# Altium PCB DCDC_POWER_SUPPLY.PcbDoc (part 1 of 2)
Units mm, origin at the board's own origin, x right, y up, seen from the top; angles counter-clockwise.
Board outline 45 x 24.5 mm, 4 copper layers (Top Layer, GND 1, GND 2, Bottom Layer), stack 0.603 mm thick; 43 components, 28 nets, 132 pads, 68 vias.
Unrouted connection lines stored in the file: 3.
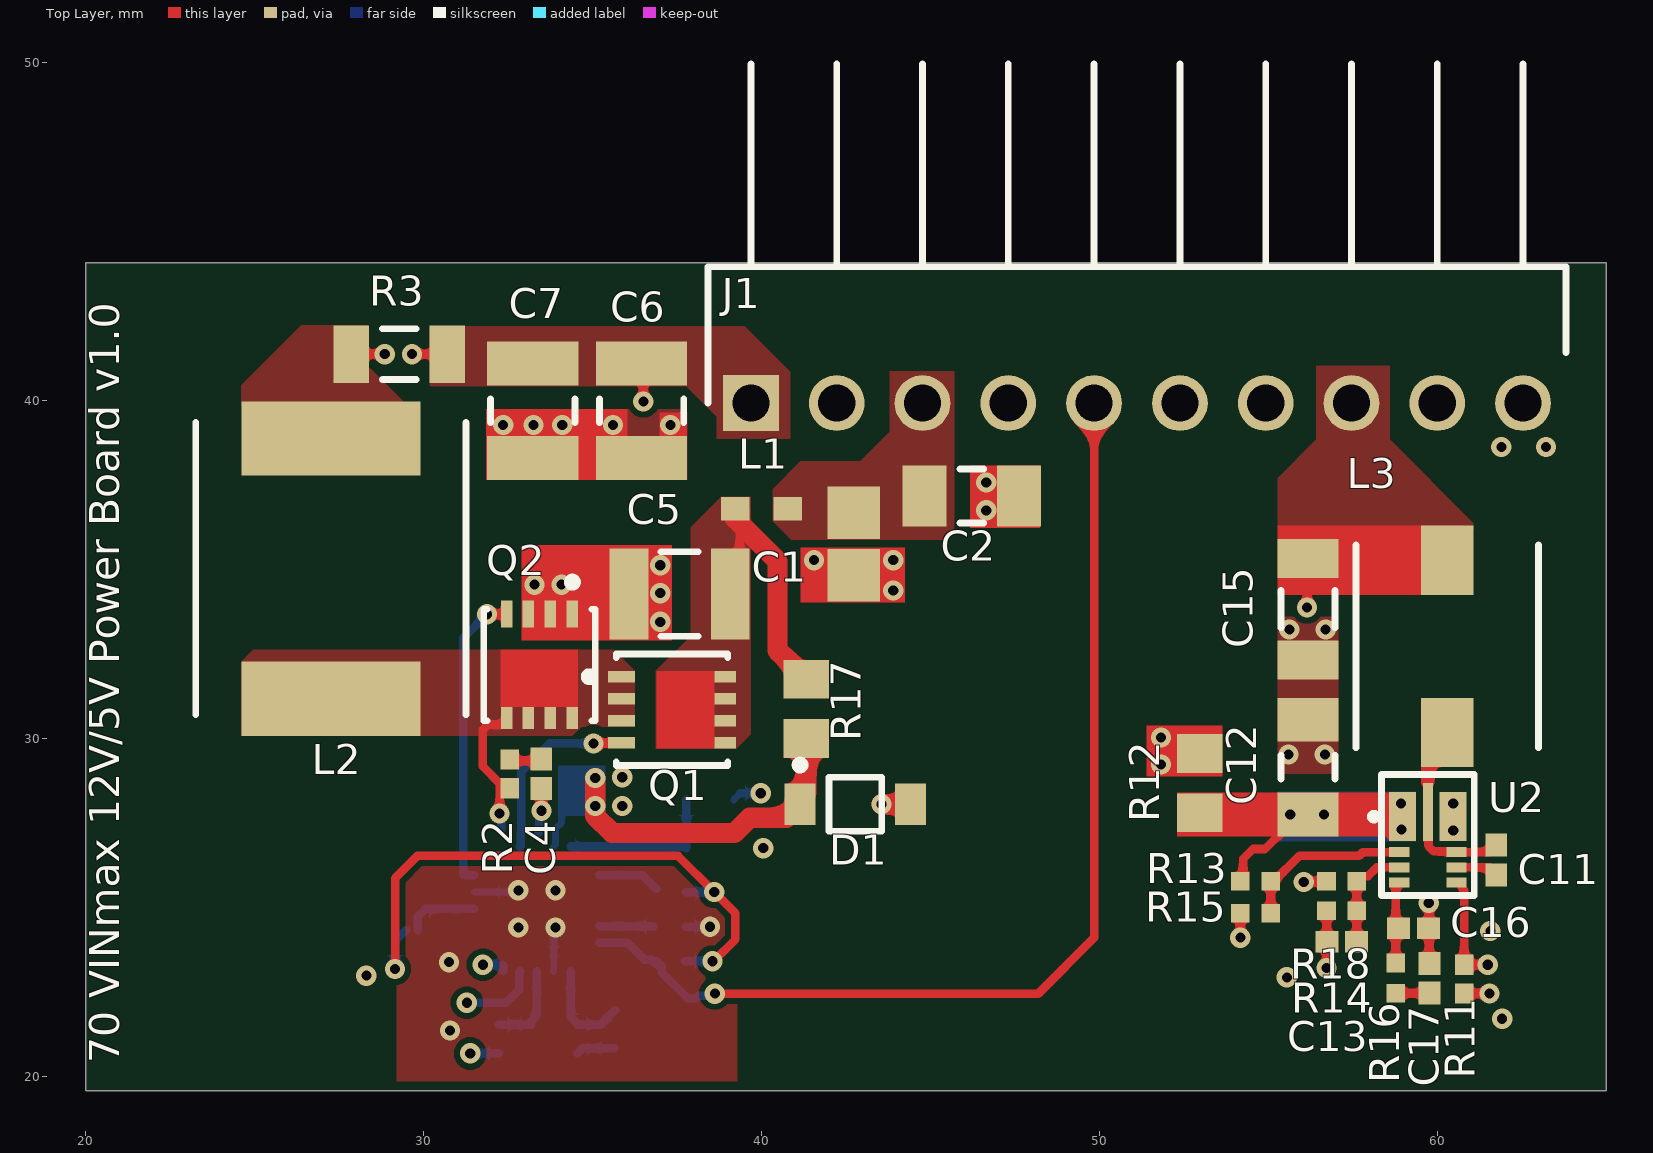
[diagram p0: Top Layer view]
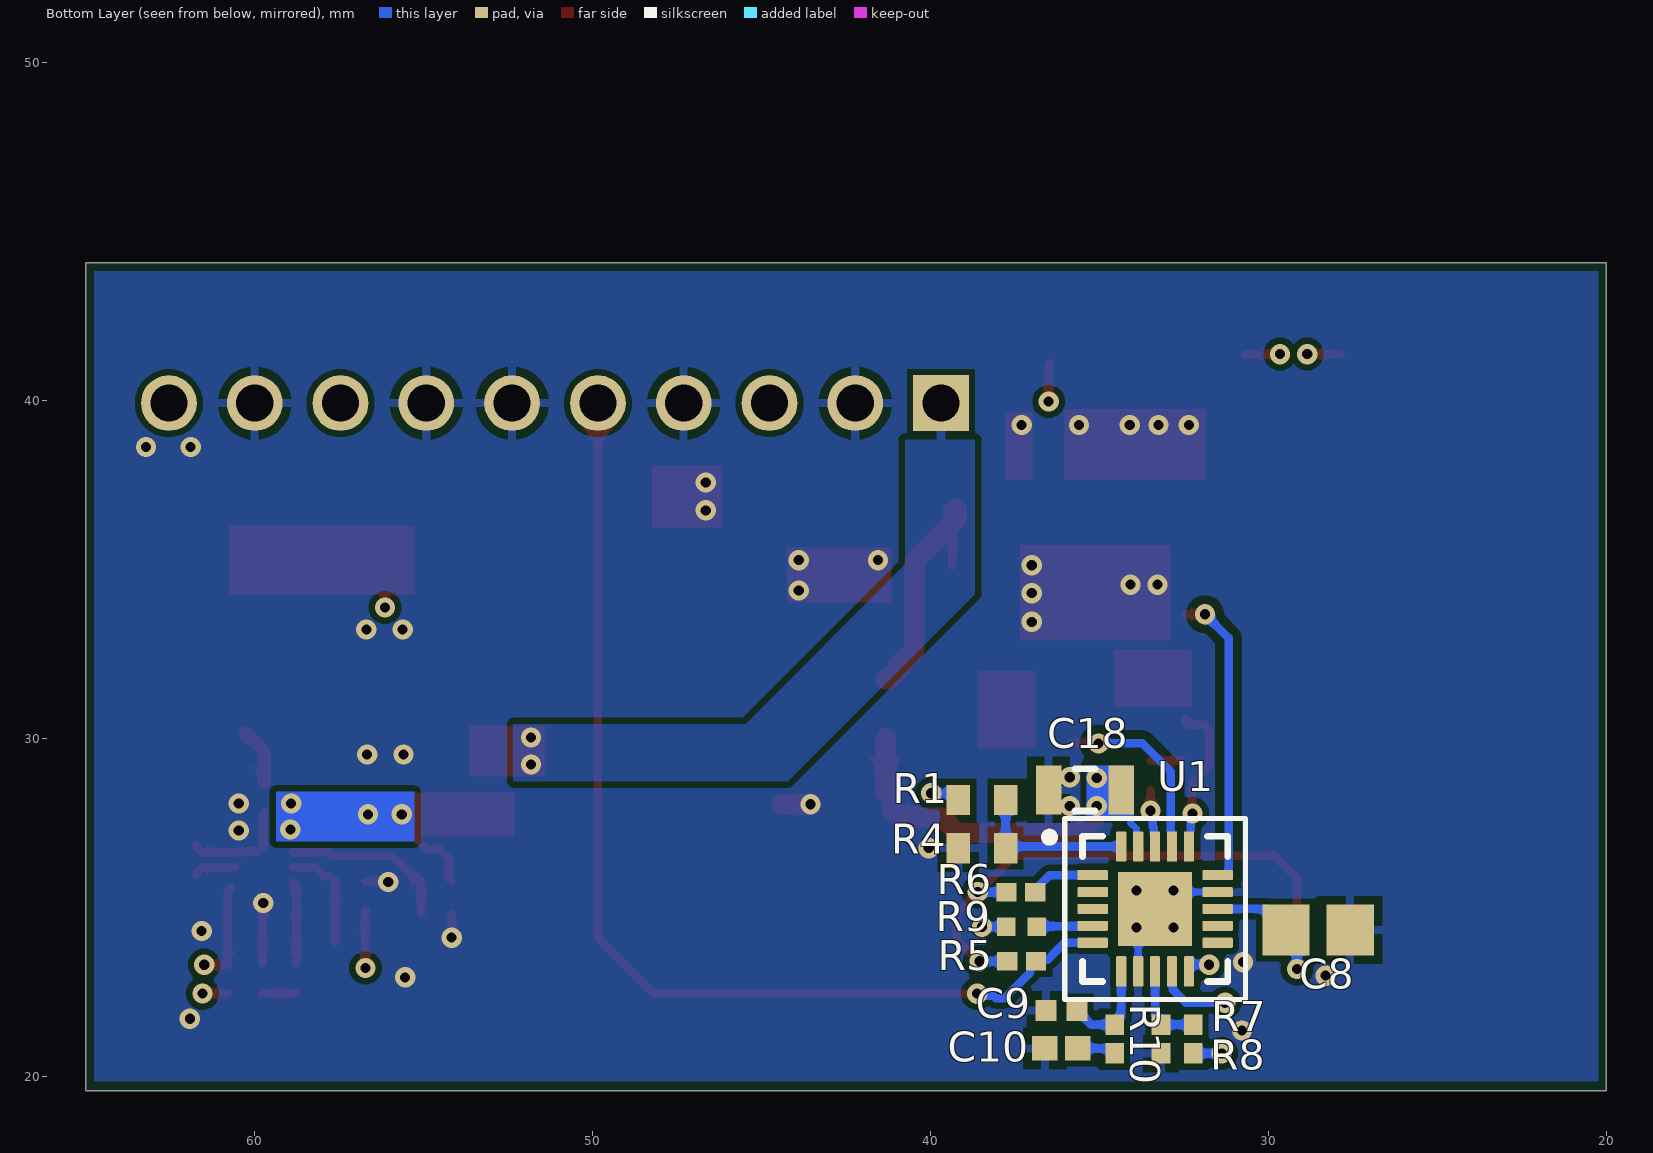
[diagram p1: Bottom Layer view, seen from below]
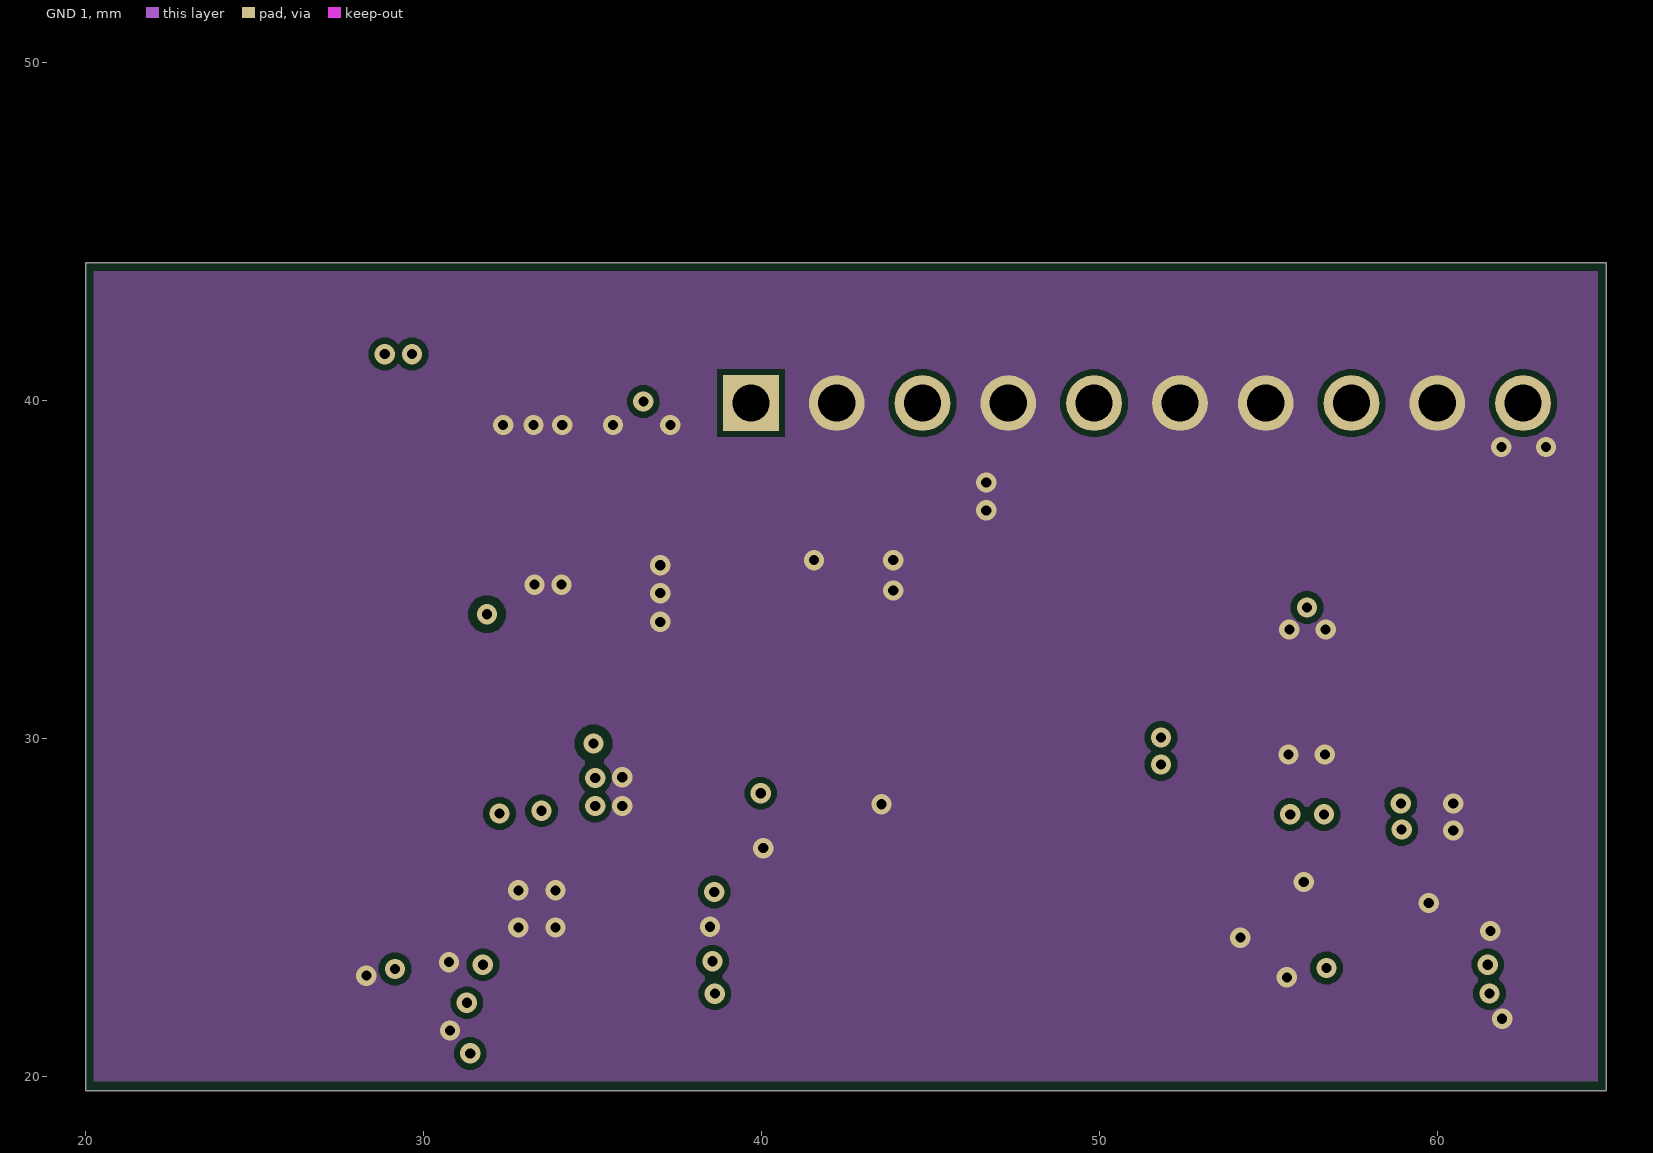
[diagram p2: GND 1]
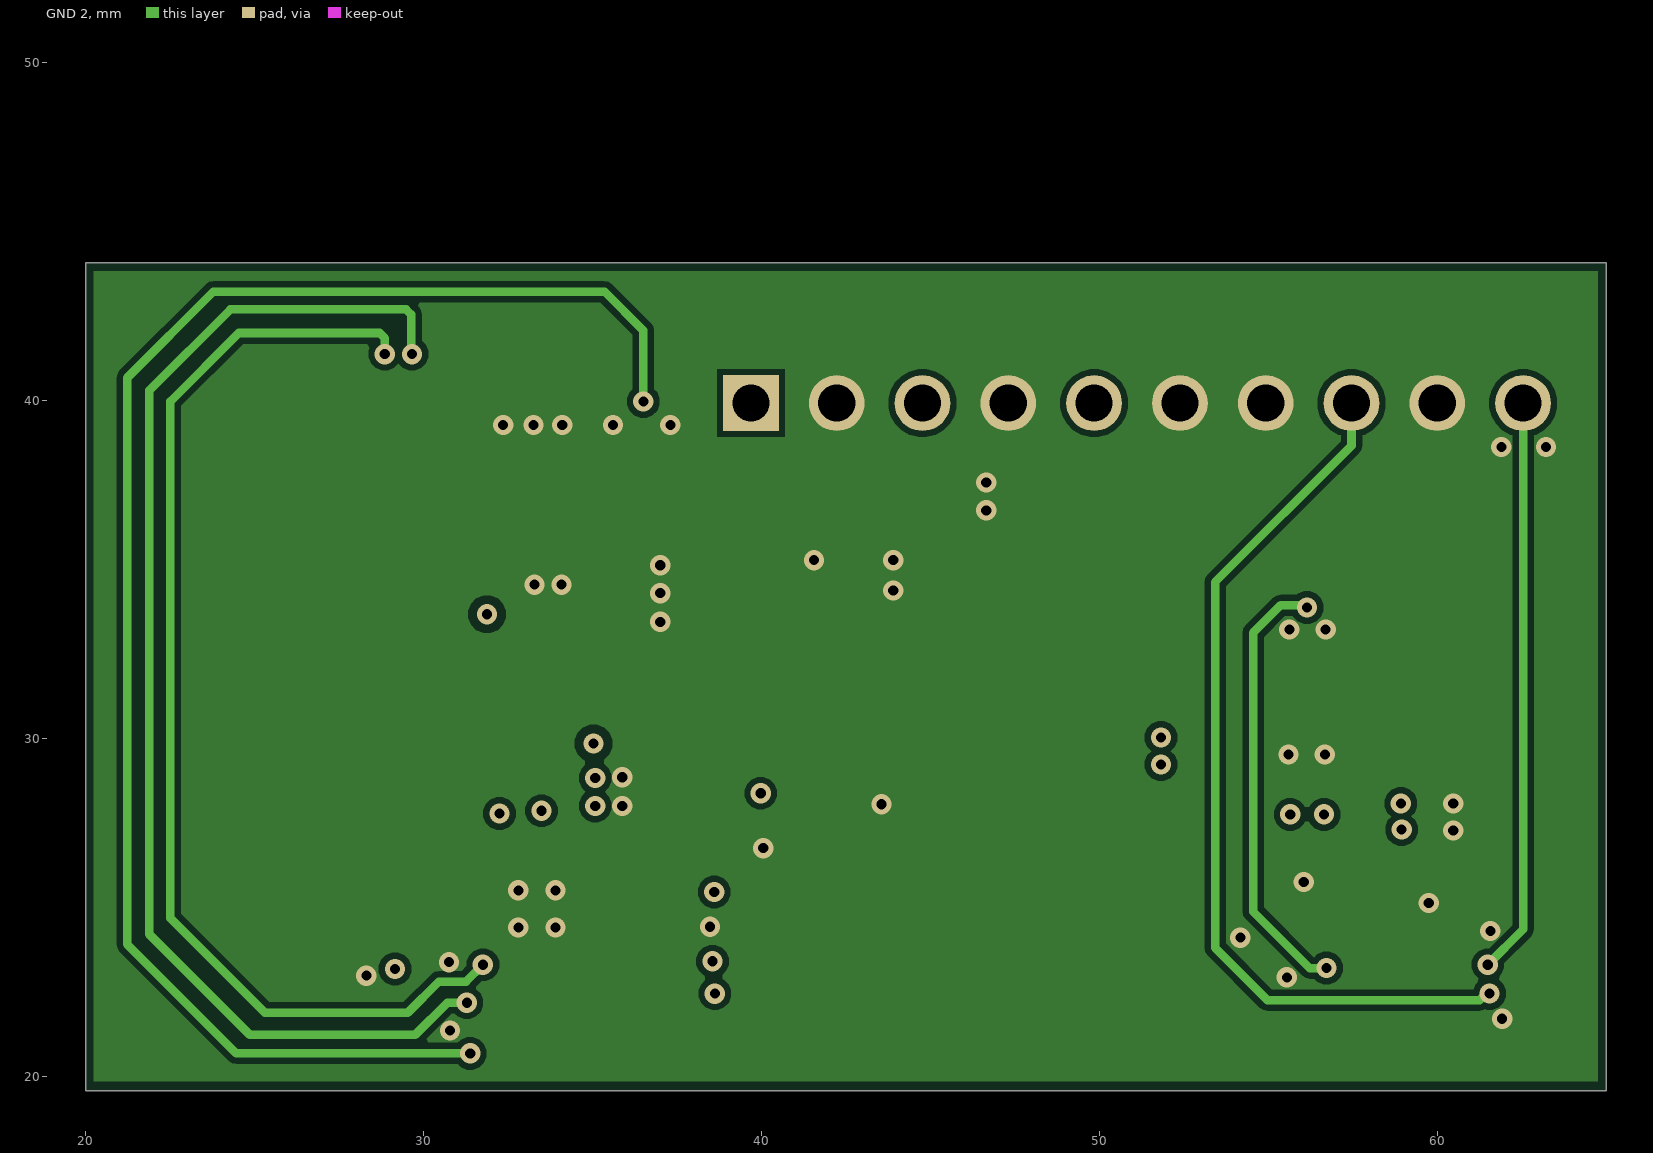
[diagram p3: GND 2]

## Layer stack, top to bottom
Top Solder: solder mask 0.0102, Solder Resist, Dk 3.5
Top Layer: signal copper 0.0356
Dielectric 2: prepreg 0.0711, PP-006, Dk 4.1
GND 1: signal copper 0.035
Dielectric 1: dielectric 0.32, FR-4, Dk 4.8
GND 2: signal copper 0.035
Dielectric 3: prepreg 0.0711, PP-006, Dk 4.1
Bottom Layer: signal copper 0.0356
Bottom Solder: solder mask 0.0102, Solder Resist, Dk 3.5

## Board outline
20,19.575 65,19.575 65,44.075 20,44.075

## Design rules (kind name [scope] priority, off if disabled: settings)
Clearance Clearance_2 [All vs InComponent('U2')] p1: gap=0.15 ignorepadtopadclearanceinfootprint=FALSE
Clearance Clearance_1 [(InNet('NetQ1_4') OR InNet('NetQ2_4'))] p2: gap=0.254 ignorepadtopadclearanceinfootprint=FALSE except(0.178: Arc-SMDPad Arc-THPad Arc-Via Track-SMDPad Track-THPad Track-Via SMDPad-SMDPad SMDPad-THPad SMDPad-Via THPad-THPad THPad-Via Via-Via)
Clearance [All] p3: gap=0.178 ignorepadtopadclearanceinfootprint=FALSE
PolygonConnect PolygonConnect_1 [OnBottomLayer] p1: thpad.connectstyle=Relief thpad.reliefconductorwidth=0.254 thpad.reliefentries=4 thpad.polygonreliefangle="90 Angle" thpad.airgapwidth=0.254 smdpad.connectstyle=Relief smdpad.reliefconductorwidth=0.254 smdpad.reliefentries=4 smdpad.polygonreliefangle="90 Angle" smdpad.airgapwidth=0.254 via.connectstyle=Direct via.reliefconductorwidth=0.254 via.reliefentries=4 via.polygonreliefangle="90 Angle" via.airgapwidth=0.254
PolygonConnect [All] p2: connectstyle=Direct reliefconductorwidth=0.254 reliefentries=4 polygonreliefangle="90 Angle" airgapwidth=0.254
RoutingVias [All] p1: holewidth=0.711 width=1.27 viastyle="Through Hole" minholewidth=0.3 minwidth=0.6 maxholewidth=0.711 maxwidth=1.27
SolderMaskExpansion [All] p1: expansion=0.06 istentingtop=FALSE
Width [All] p1: maxlimit=5 minlimit=0.2 preferedwidth=0.254
30 further rules are at their usual default settings.

## Classes and differential pairs
component class LV_BUCK: C11 C12 C13 C15 C16 C17 L3 R11 R12 R13 R14 R15 R16 R18 U2
component class HV_BUCK: C1 C2 C4 C5 C6 C7 C8 C9 C10 C18 D1 J1 L1 L2 Q1 Q2 R1 R2 R3 R4 R5 R6 R7 R8 R9 R10 R17 U1

## Components (designator, comment, footprint, x,y, rotation, side; value= is the part's Value field where it differs from the comment)
C1 "10nF" CAPC2013X94X50ML20T25 42.725,35.75 r90 top
C2 "1uF" CAPC3216X180X50NL20T25 46.225,37.175 r180 top
C4 "100nF" CAPC1005X56X25NL10T15 33.475,28.95 r90 top
C5 "CAP 2.2uF 100V" CAPC1210(3225)280_N 37.575,34.275 r0 top value=2.2uF
C6 "22uF" CAPC3225X279X50NL20T25 36.45,39.7 r90 top
C7 "22uF" CAPC3225X279X50NL20T25 33.225,39.7 r90 top
C8 "2.2uF" CAPC2013X135X50ML10T20 28.525,24.325 r0 bottom
C9 "1pF" CAPC1005X55X25NL05T05 36.125,21.95 r180 bottom
C10 "1.5nF" CAPC1005X55X25ML05T10 36.125,20.825 r180 bottom
C11 "100nF" CAPC1005X56X25NL10T15 61.75,26.4 r270 top
C12 "4.7uF" CAPC3216X180X50NL20T25 56.175,29.15 r270 top
C13 "10pF" CAPC1005X56X25NL10T15 57.175,23.975 r180 top
C15 "22uF" CAPC1206(3216)190_N 56.175,33.825 r90 top
C16 "15pF" CAPC1005X56X25NL10T15 59.3,24.375 r180 top
C17 "10nF" CAPC1005X56X25NL10T15 59.775,22.9 r270 top
C18 "1uF" CAPC2013X145X20NL20 35.425,28.475 r180 bottom
D1 "62V" ONSC-SOD-123-2-425-04_V 42.775,28.05 r0 top
J1 "61301011021" HDRRA10W64P0X254_1X10_2540X254X254P 39.685,39.925 r0 top
L1 "742792651" SMD-0603 40,36.8 r180 top
L2 "22uH" INDPM8680X400N 27.25,35.025 r90 top
L3 "PA4340.103NLT" INDPM6054X300N 60.3,32.725 r90 top
Q1 "IAUZ20N08S5L300" INF-PG-TSDSON-8-1_V 37.35,30.85 r180 top
Q2 "IAUZ20N08S5L300" INF-PG-TSDSON-8-1_V 33.425,32.175 r90 top
R1 "1M" RESC1608X55X25NL10T15 38.475,28.175 r0 bottom
R2 "3R3" RESC1005X40X25NL05T10 32.55,28.95 r90 top
R3 "27 mOhm" RESC3116X65X40NL10T20 29.275,41.375 r0 top
R4 "100K" RESC1608X55X25NL10T15 38.475,26.75 r180 bottom
R5 "100K" RESC1005X40X25NL05T10 37.3,23.4 r180 bottom
R6 "100K" RESC1005X40X25NL05T10 37.325,25.45 r180 bottom
R7 "162K" RESC1005X40X25NL05T10 32.225,21.1 r270 bottom
R8 "10K" RESC1005X40X25NL05T10 33.175,21.1 r90 bottom
R9 "28.7K" RESC1005X40X25NL05T05 37.3,24.425 r180 bottom
R10 "392K" RESC1005X40X25NL05T10 34.55,21.1 r90 bottom
R11 "100K" RESC1005X40X25NL05T10 60.8,22.875 r270 top
R12 "4.7R" RESC2013X70X40NL20T20 52.975,28.675 r90 top
R13 "470k" RESC1005X40X25NL05T05 54.625,25.775 r180 top
R14 "158K" RESC1005X40X25NL05T05 57.175,24.9 r180 top
R15 "82k" RESC1005X40X25NL05T05 54.625,24.825 r0 top
R16 "42.2K" RESC1005X40X25NL05T05 58.775,22.9 r90 top
R17 "4.7R" RESC2013X70X40NL20T20 41.325,30.875 r90 top
R18 "30K" RESC1005X40X25NL05T05 57.175,25.775 r0 top
U1 "MAX25208" QFN50P400X400X80_HS-21N 33.35,24.95 r180 bottom
U2 "AP63357QZV-7" AP63357QZV7 59.725,26.975 r0 top

## Footprints (in the part's own frame and the unit in brackets; to place one, negate y for a bottom-side part, rotate by r counter-clockwise, add the part's x,y. Pads: shape width x height; smd on the part's side, far side on the other; paste and mask are expansions set on the pad)
AP63357QZV7 [mm]
  rect 0.8x1.45 smd: 1(-0.75,0.707) 8(0.75,0.707)
  rect 0.6x0.3 smd: 2(-0.85,-0.344) 3(-0.85,-0.794) 4(-0.85,-1.244) 5(0.85,-1.244) 6(0.85,-0.794) 7(0.85,-0.344)
  rect 0.3x1.725 smd: 9(0,0.844)
  silkscreen extent -1.7,0.61 -1.5,0.81, body extent -1,-1.5 1,1.5, height 0.95
CAPC1005X55X25ML05T10 [mm] "Chip Capacitor, 2-Leads, Body 1.00x0.50mm, IPC Low Density"
  rect 0.76x0.72 smd: 1(-0.49,0) 2(0.49,0)
  body extent -0.53,-0.28 0.53,0.27, height 0.55
CAPC1005X55X25NL05T05 [mm] "Chip Capacitor, 2-Leads, Body 1.00x0.50mm, IPC Medium Density"
  rect 0.62x0.62 smd: 1(-0.46,0) 2(0.46,0)
  body extent -0.53,-0.28 0.53,0.27, height 0.55
CAPC1005X56X25NL10T15 [mm] "Chip Capacitor, 2-Leads, Body 1.00x0.50mm, IPC Medium Density"
  rect 0.68x0.64 smd: 1(-0.44,0) 2(0.44,0)
  body extent -0.55,-0.3 0.55,0.3, height 0.56
CAPC1206(3216)190_N [mm] "Chip Capacitor, Body 3.2x1.6mm, Height 1.9mm, IPC Medium Density"
  rect 1.15x1.8 smd: 1(-1.5,0) 2(1.5,0)
  silkscreen extent -0.55,-0.8 0.55,0.8, body extent -1.7,-0.9 1.7,0.9, height 1.9
CAPC1210(3225)280_N [mm] "Chip Capacitor, Body 3.2x2.5mm, Height 2.8mm, IPC Medium Density"
  rect 1.15x2.7 smd: 1(-1.5,0) 2(1.5,0)
  silkscreen extent -0.55,-1.25 0.55,1.25, body extent -1.7,-1.4 1.7,1.4, height 2.8
CAPC2013X94X50ML20T25 [mm] "Chip Capacitor, 2-Leads, Body 2.01x1.25mm, IPC Low Density"
  rect 1.55x1.55 smd: 1(-0.925,0) 2(0.925,0)
  body extent -1.1,-0.72 1.11,0.72, height 0.94
CAPC2013X135X50ML10T20 [mm] "Chip Capacitor, 2-Leads, Body 2.00x1.25mm, IPC Low Density"
  rect 1.4x1.5 smd: 1(-0.95,0) 2(0.95,0)
  body extent -1.05,-0.67 1.05,0.67, height 1.35
CAPC2013X145X20NL20 [mm] "Chip Capacitor, 2-Leads, Body 2.20x1.45mm, IPC Medium Density"
  rect 0.75x1.45 smd: 1(-1.075,0) 2(1.075,0)
  silkscreen extent -0.3,-0.63 0.3,0.63, body extent -1.1,-0.72 1.1,0.72, height 1.45
CAPC3216X180X50NL20T25 [mm] "Chip Capacitor, 2-Leads, Body 3.20x1.60mm, IPC Medium Density"
  rect 1.3x1.8 smd: 1(-1.4,0) 2(1.4,0)
  silkscreen extent -0.35,-0.8 0.35,0.8, body extent -1.7,-0.9 1.7,0.9, height 1.8
CAPC3225X279X50NL20T25 [mm] "Chip Capacitor, 2-Leads, Body 3.40x2.70mm, IPC Medium Density"
  rect 1.3x2.7 smd: 1(-1.4,0) 2(1.4,0)
  silkscreen extent -0.35,-1.25 0.35,1.25, body extent -1.7,-1.35 1.7,1.35, height 2.79
HDRRA10W64P0X254_1X10_2540X254X254P [mm]
  rect 1.65x1.65 hole 1.1: 1(0,0)
  round 1.65 hole 1.1: 2(2.54,0) 3(5.08,0) 4(7.62,0) 5(10.16,0) 6(12.7,0) 7(15.24,0) 8(17.78,0) 9(20.32,0) 10(22.86,0)
  silkscreen extent -1.27,0 24.13,10.04, body extent -1.27,-0.32 24.13,10.04, height 2.54
INDPM6054X300N [mm]
  rect 2.05x1.55 smd: 1(-2.55,0) 2(2.55,0)
  silkscreen extent -3,-2.7 3,2.7, body extent -3,-2.7 3,2.7, height 3
INDPM8680X400N [mm]
  rect 2.2x5.3 smd: 1(-3.85,0) 2(3.85,0)
  silkscreen extent -4.33,-4 4.33,4, body extent -4.33,-4 4.33,4, height 4
INF-PG-TSDSON-8-1_V [mm] "TSDSON, 8-Leads, Body 3.3x3.3mm, Pitch 0.65mm"
  rect 0.8x0.34 smd: 1(1.5,-0.975) 2(1.5,-0.325) 3(1.5,0.325) 4(1.5,0.975)
  rect 0.65x0.34 smd: 5(-1.575,0.975) 6(-1.575,0.325) 7(-1.575,-0.325) 8(-1.575,-0.975)
  Top Layer region: -1.25,-1.145 0.46,-1.145 0.46,1.145 -1.25,1.145
  silkscreen extent -1.65,-1.65 2.57,1.65, body extent -1.65,-1.65 1.65,1.65, height 1.1
ONSC-SOD-123-2-425-04_V [mm] "SOD, 2-Leads, Body 2.69x1.6mm"
  rect 0.91x1.22 smd: 1(-1.635,0) 2(1.635,0)
  silkscreen extent -1.76,-0.8 0.78,1.28, body extent -1.35,-0.8 1.35,0.8, height 1.35
QFN50P400X400X80_HS-21N [mm] "QFN, 20-Leads, Body 4.00x4.00mm, Pitch 0.50mm, Thermal Pad 2.20x2.20mm, IPC Medium Density"
  rrect20% 0.9x0.3 smd: 1(-1.85,1) 2(-1.85,0.5) 3(-1.85,0) 4(-1.85,-0.5) 5(-1.85,-1) 11(1.85,-1) 12(1.85,-0.5) 13(1.85,0) 14(1.85,0.5) 15(1.85,1)
  rrect20% 0.3x0.9 smd: 6(-1,-1.85) 7(-0.5,-1.85) 8(0,-1.85) 9(0.5,-1.85) 10(1,-1.85) 16(1,1.85) 17(0.5,1.85) 18(0,1.85) 19(-0.5,1.85) 20(-1,1.85)
  rect 2.2x2.2 smd: 21(0,0)
  silkscreen extent -3.25,-2.68 2.68,2.68, body extent -2,-2 2,2, height 0.8
RESC1005X40X25NL05T05 [mm] "Chip Resistor, 2-Leads, Body 1.00x0.50mm, IPC Medium Density"
  rect 0.55x0.55 smd: 1(-0.45,0) 2(0.45,0)
  body extent -0.53,-0.27 0.53,0.28, height 0.4
RESC1005X40X25NL05T10 [mm] "Chip Resistor, 2-Leads, Body 1.00x0.50mm, IPC Medium Density"
  rect 0.6x0.55 smd: 1(-0.425,0) 2(0.425,0)
  body extent -0.53,-0.27 0.53,0.28, height 0.4
RESC1608X55X25NL10T15 [mm] "Chip Resistor, 2-Leads, Body 1.60x0.80mm, IPC Medium Density"
  rect 0.7x0.9 smd: 1(-0.7,0) 2(0.7,0)
  body extent -0.85,-0.45 0.85,0.45, height 0.55
RESC2013X70X40NL20T20 [mm] "Chip Resistor, 2-Leads, Body 2.2x1.35mm, IPC Medium Density"
  rect 1.15x1.35 smd: 1(-0.875,0) 2(0.875,0)
  body extent -1.1,-0.67 1.1,0.67, height 0.7
RESC3116X65X40NL10T20 [mm] "Chip Resistor, 2-Leads, Body 3.10x1.60mm, IPC Medium Density"
  rect 1.05x1.7 smd: 1(-1.425,0) 2(1.425,0)
  silkscreen extent -0.5,-0.75 0.5,0.75, body extent -1.6,-0.85 1.6,0.85, height 0.65
SMD-0603 [mm] "Chip Inductor, 2-Leads, Body 1.6x0.8mm"
  rect 0.85x0.7 smd: 1(-0.775,0) 2(0.775,0)
  body extent -0.8,-0.4 0.8,0.4, height 0.79

## Part data
C1: library part CMP-2007-04169-1, "Cap Ceramic 0.01uF 100V X7R 10% SMD 0805 FlexiTerm 125C Paper T/R", Case Code (Imperial)=0805, Case Code (Metric)=2012, Dielectric=X7R, Manufacturer="AVX Interconnect / Elco", Manufacturer Part Number=08051C103KAZ2A, Max Operating Temperature=125°C, Min Operating Temperature=-55°C, Package Quantity=1, Supplier Part Number 1=478-3559-1-ND, Temperature coefficient=30ppm/°C, Tolerance=10%, Voltage=100V, Capacitance=10nF, Case/Package=0805, Category="Ceramic Capacitors", ComponentLink1Description=https://datasheet.ciiva.com/26904/getdatasheetpartid-136837-26904192.pdf?src-supplier=Verical, ComponentLink1URL=https://datasheet.ciiva.com/26904/getdatasheetpartid-136837-26904192.pdf?src-supplier=Verical, ComponentLink2Description=https://datasheet.ciiva.com/11787/0900766b80dc2409-11787665.pdf?src-supplier=RSComponents, ComponentLink2URL=https://datasheet.ciiva.com/11787/0900766b80dc2409-11787665.pdf?src-supplier=RSComponents, ComponentLink3Description=https://datasheet.ciiva.com/151/flexiterm-151492.pdf?src-supplier=Digi-Key, ComponentLink3URL=https://datasheet.ciiva.com/151/flexiterm-151492.pdf?src-supplier=Digi-Key, ComponentLink4Description=https://datasheet.ciiva.com/151/flexiterm-151493.pdf?src-supplier=Digi-Key, ComponentLink4URL=https://datasheet.ciiva.com/151/flexiterm-151493.pdf?src-supplier=Digi-Key, ComponentLink5Description=https://datasheet.ciiva.com/16326/cx7r-16326741.pdf?src-supplier=Future+Electronics, ComponentLink5URL=https://datasheet.ciiva.com/16326/cx7r-16326741.pdf?src-supplier=Future+Electronics, ComponentLink6Description=https://datasheet.ciiva.com/151/flexiterm-151494.pdf?src-supplier=Digi-Key, ComponentLink6URL=https://datasheet.ciiva.com/151/flexiterm-151494.pdf?src-supplier=Digi-Key, ComponentLink7Description=https://datasheet.ciiva.com/16625/flexiterm-16625227.pdf?src-supplier=Avnet+Europe, ComponentLink7URL=https://datasheet.ciiva.com/16625/flexiterm-16625227.pdf?src-supplier=Avnet+Europe, ComponentLink8Description=https://datasheet.ciiva.com/11508/flexiterm-11508220.pdf?src-supplier=Avnet, ComponentLink8URL=https://datasheet.ciiva.com/11508/flexiterm-11508220.pdf?src-supplier=Avnet, ComponentLink9Description=https://datasheet.ciiva.com/5416/cx7r-218113-5416686.pdf?src-supplier=Mouser, ComponentLink9URL=https://datasheet.ciiva.com/5416/cx7r-218113-5416686.pdf?src-supplier=Mouser, Construction=Flat, Depth=1.25mm, Dissipation Factor=2.5%, Features="Soft Termination", Height=0.94mm, Lead Free="Lead Free", Length=2.01mm, Mount="Surface Mount", Number of Pins=2, Packaging="Tape and Reel", Part Number=08051C103KAZ2A, Pricing 1="1=0.27000, 10=0.18200, 50=0.10880, 100=0.09200, 500=0.06292, 1000=0.05566 (USD)", Radiation Hardening=No, REACH SVHC="No SVHC", RoHS=Yes, RoHS Compliant=Yes, Series=FLEXITERM®, Stock 1=40, Supplier 1=Digi-Key, Termination=SMD/SMT, Thickness=0.037inch, Voltage Rating=100V, Voltage Rating (DC)=100V, Width=0.049inch
C2: library part CMP-1037-04728-2, "Chip Capacitor, 1 uF, +/- 10%, 100 V, -55 to 125 degC, 1206 (3216 Metric), RoHS, Tape and Reel", Capacitance=1µF, Case Size/Dimension=1206, Dielectric=X7R, Manufacturer=AVX, Package Description="2-Pin Surface Mount Device, Body 3.2 x 1.6 mm", Rated Voltage=100V, Tolerance (%)=±10%, Datasheet URL=http://datasheets.avx.com/X7RDielectric.pdf, Datasheet Version=07/2016, Manufacturer URL=http://www.avx.com/, Mounting Technology=SurfaceMount, Package Reference=1206
C4 C11: library part CMP-2008-02800-1, "AVX 0.1uF Multilayer Ceramic Capacitor (MLCC) 16 V dc 10% X7R dielectric 402 SMT max op. temp. +125C", Case Code (Imperial)=0402, Case Code (Metric)=1005, Dielectric=X7R, Dielectric Material=Ceramic, Manufacturer="AVX Interconnect / Elco", Manufacturer Part Number=0402YC104KAT2A, Max Operating Temperature=125°C, Min Operating Temperature=-55°C, Package Quantity=1, Supplier Part Number 1=478-7888-1-ND, Tolerance=10%, Voltage=16V, Capacitance=100nF, Case/Package=0402, Category="Ceramic Capacitors", ComponentLink1Description=https://datasheet.ciiva.com/1123/1679506-1123956.pdf?src-supplier=Element14, ComponentLink1URL=https://datasheet.ciiva.com/1123/1679506-1123956.pdf?src-supplier=Element14, ComponentLink2Description=https://datasheet.ciiva.com/7614/cx7r-7614662.pdf?src-supplier=Digi-Key, ComponentLink2URL=https://datasheet.ciiva.com/7614/cx7r-7614662.pdf?src-supplier=Digi-Key, ComponentLink3Description=https://datasheet.ciiva.com/22693/1679506-22693578.pdf?src-supplier=Element14, ComponentLink3URL=https://datasheet.ciiva.com/22693/1679506-22693578.pdf?src-supplier=Element14, ComponentLink4Description=https://datasheet.ciiva.com/16623/cx7r-16623291.pdf?src-supplier=Avnet+Europe, ComponentLink4URL=https://datasheet.ciiva.com/16623/cx7r-16623291.pdf?src-supplier=Avnet+Europe, ComponentLink5Description=https://datasheet.ciiva.com/2987/cx7r-2987708.pdf?src-supplier=Avnet, ComponentLink5URL=https://datasheet.ciiva.com/2987/cx7r-2987708.pdf?src-supplier=Avnet, ComponentLink6Description=https://datasheet.ciiva.com/6265/cx7r-6265276.pdf?src-supplier=Digi-Key, ComponentLink6URL=https://datasheet.ciiva.com/6265/cx7r-6265276.pdf?src-supplier=Digi-Key, ComponentLink7Description=https://datasheet.ciiva.com/28613/1679506-28613260.pdf?src-supplier=Element14, ComponentLink7URL=https://datasheet.ciiva.com/28613/1679506-28613260.pdf?src-supplier=Element14, ComponentLink8Description=https://datasheet.ciiva.com/5411/cx7r-218113-5411197.pdf?src-supplier=Mouser, ComponentLink8URL=https://datasheet.ciiva.com/5411/cx7r-218113-5411197.pdf?src-supplier=Mouser, ComponentLink9Description=https://datasheet.ciiva.com/7709/1679506-7709566.pdf?src-supplier=Element14, ComponentLink9URL=https://datasheet.ciiva.com/7709/1679506-7709566.pdf?src-supplier=Element14, Construction=Flat, Contact Plating=Tin,Matte, Depth=0.5mm, Height=0.56mm, Lead Free="Lead Free", Length=1mm, Mount="Surface Mount,PCB", Packaging="Tape and Reel", Part Number=0402YC104KAT2A, Pricing 1="1=0.10000, 10=0.01600, 50=0.00860, 100=0.00700, 500=0.00500, 1000=0.00393, 2500=0.00358, 5000=0.00329 (USD)", Radiation Hardening=No, REACH SVHC=Unknown, RoHS=Yes, RoHS Compliant=Yes, Series=-, Stock 1=72315, Supplier 1=Digi-Key, Termination=SMD/SMT, Thickness=0.022inch, Voltage Rating=16V, Voltage Rating (DC)=16V, Width=0.02inch
C5: library part CMP-1038-02104-1, "CAP 2.2uF 100V ±10% 1210 (3225 Metric) Thickness 2.8mm SMD", Case-EIA=1210, Case-Metric=3225, Rated Voltage="100 V", Tolerance=Â±10%, Max Thickness="2.8 mm", Technology=SMT
C6 C7: library part CMP-2000-05478-1, "Ceramic Capacitor, 25 V, 22 uF, +/-10%, -55 to 85 degC, 2-Pin SMD (1210), RoHS, Tape and Reel", Case Code - in=1210, Case Code - mm=3225, Case Height=2.79mm, Case Length=3.2mm, Case Width=2.5mm, Dielectric=X5R, Manufacturer=AVX, Maximum Operating Temperature=+85C, Minimum Operating Temperature=-55C, Operating Temperature Range=-55Cto+85C, Package / Case=1210(3225metric), Package Description="2-Pin Surface Mount Device, Body 3.2 x 2.5 mm", Temperature Coefficient / Code=+/-15%, Tolerance=10%, Voltage Rating=25V, Brand=AVX, Capacitance=22uF, Datasheet URL=http://datasheets.avx.com/cx5r.pdf, Datasheet Version=05/2016, Dimensions=2.5mmWx3.2mmLx2.79mmH, Factory Pack Quantity=1000, Manufacturer URL=http://www.avx.com/, Mounting Technology=SurfaceMount, Package Reference=1210, Packaging=Reel, Product=GeneralTypeMLCCs, Product Category=MultilayerCeramicCapacitorsMLCC-SMD/SMT, RoHS=Details, Termination Style=SMD/SMT, Type=StandardX5RMLCCs, Voltage Rating DC=25V
C8: library part CMP-2007-03455-1, Case Code (Imperial)=0805, Case Code (Metric)=2012, Dielectric=X7R, Manufacturer=Murata, Manufacturer Part Number=GRM21BR71C225KA12L, Max Operating Temperature=125°C, Min Operating Temperature=-55°C, Package Quantity=1, Supplier Part Number 1=490-3906-1-ND, Tolerance=10%, Voltage=16V, Capacitance=2.2uF, Case/Package=0805, Category="Ceramic Capacitors", ComponentLink1Description=https://datasheet.ciiva.com/3777/97grm21br71c225ka1223-3777119.pdf?src-supplier=Arrow+Electronics, ComponentLink1URL=https://datasheet.ciiva.com/3777/97grm21br71c225ka1223-3777119.pdf?src-supplier=Arrow+Electronics, ComponentLink2Description=https://datasheet.ciiva.com/7937/608985-7937701.pdf?src-supplier=Element14, ComponentLink2URL=https://datasheet.ciiva.com/7937/608985-7937701.pdf?src-supplier=Element14, ComponentLink3Description=https://datasheet.ciiva.com/5416/product-5416103.pdf?src-supplier=Mouser, ComponentLink3URL=https://datasheet.ciiva.com/5416/product-5416103.pdf?src-supplier=Mouser, ComponentLink4Description=https://datasheet.ciiva.com/11615/product-11615451.pdf?src-supplier=Avnet, ComponentLink4URL=https://datasheet.ciiva.com/11615/product-11615451.pdf?src-supplier=Avnet, ComponentLink5Description=https://datasheet.ciiva.com/16440/product-16440619.pdf?src-supplier=Future+Electronics, ComponentLink5URL=https://datasheet.ciiva.com/16440/product-16440619.pdf?src-supplier=Future+Electronics, ComponentLink6Description=https://datasheet.ciiva.com/137/partnumbering-e-01-137677.pdf?src-supplier=Digi-Key, ComponentLink6URL=https://datasheet.ciiva.com/137/partnumbering-e-01-137677.pdf?src-supplier=Digi-Key, ComponentLink7Description=https://datasheet.ciiva.com/137/partnumbering-e-01-137678.pdf?src-supplier=Digi-Key, ComponentLink7URL=https://datasheet.ciiva.com/137/partnumbering-e-01-137678.pdf?src-supplier=Digi-Key, ComponentLink8Description=https://datasheet.ciiva.com/137/partnumbering-e-01-137679.pdf?src-supplier=Digi-Key, ComponentLink8URL=https://datasheet.ciiva.com/137/partnumbering-e-01-137679.pdf?src-supplier=Digi-Key, Construction=Flat, Depth=1.25mm, Height=1.25mm, Lead Free="Lead Free", Length=2mm, Mount="Surface Mount", Number of Pins=2, Packaging="Tape and Reel", Part Number=GRM21BR71C225KA12L, Pricing 1="1=0.33000, 10=0.23000, 50=0.15300, 100=0.13010, 500=0.09184, 1000=0.08036 (USD)", Radiation Hardening=No, REACH SVHC="No SVHC", RoHS=Yes, RoHS Compliant=Yes, Series=GRM, Stock 1=321, Supplier 1=Digi-Key, Termination=SMD/SMT, Thickness=0.053inch, Voltage Rating=16V, Voltage Rating (DC)=16V, Width=1.25mm
C9: library part CMP-2100-03588-1, "Chip Capacitor, 1 pF, +/- 0.25 pF, 50 V, -55 to 125 degC, 0402 (1005 Metric), RoHS, Tape and Reel", Case Code (Imperial)=0402, Case Code (Metric)=1005, Dielectric=C0G, Dielectric Material=Ceramic, Insulation Resistance=100GR, Manufacturer=Yageo, Manufacturer Part Number=CC0402CRNPO9BN1R0, Max Operating Temperature=125degC, Min Operating Temperature=-55degC, Package Description="2-Pin Surface Mount Device, Body 1 x 0.5 mm", Package Quantity=10000, Supplier Part Number 1=311-2076-1-ND, Tolerance=5%, Voltage Rating=50V, Capacitance=1pF, Case/Package=0402, Category="Ceramic Capacitors", ComponentLink1Description=https://datasheet.ciiva.com/17437/upy-gp-np0-16v-to-50v-8-17437445.pdf?src-supplier=Avnet+Europe, ComponentLink1URL=https://datasheet.ciiva.com/17437/upy-gp-np0-16v-to-50v-8-17437445.pdf?src-supplier=Avnet+Europe, ComponentLink2Description=https://datasheet.ciiva.com/8033/1443161-8033590.pdf?src-supplier=Element14, ComponentLink2URL=https://datasheet.ciiva.com/8033/1443161-8033590.pdf?src-supplier=Element14, ComponentLink3Description=https://datasheet.ciiva.com/11587/upy-gp-np0-16v-to-50v-8-11587159.pdf?src-supplier=Avnet, ComponentLink3URL=https://datasheet.ciiva.com/11587/upy-gp-np0-16v-to-50v-8-11587159.pdf?src-supplier=Avnet, ComponentLink4Description=https://datasheet.ciiva.com/17437/upy-gp-np0-16v-to-50v-8-17437447.pdf?src-supplier=Avnet+Europe, ComponentLink4URL=https://datasheet.ciiva.com/17437/upy-gp-np0-16v-to-50v-8-17437447.pdf?src-supplier=Avnet+Europe, ComponentLink5Description=https://datasheet.ciiva.com/176/mlccorderingcode-176344.pdf?src-supplier=Digi-Key, ComponentLink5URL=https://datasheet.ciiva.com/176/mlccorderingcode-176344.pdf?src-supplier=Digi-Key, ComponentLink6Description=https://datasheet.ciiva.com/7656/1132289-7656600.pdf?src-supplier=Element14, ComponentLink6URL=https://datasheet.ciiva.com/7656/1132289-7656600.pdf?src-supplier=Element14, ComponentLink7Description=https://datasheet.ciiva.com/11587/upy-gp-np0-16v-to-50v-8-11587161.pdf?src-supplier=Avnet, ComponentLink7URL=https://datasheet.ciiva.com/11587/upy-gp-np0-16v-to-50v-8-11587161.pdf?src-supplier=Avnet, ComponentLink8Description=https://datasheet.ciiva.com/13389/upy-gp-np0-16v-to-50v-8-13389355.pdf?src-supplier=Mouser, ComponentLink8URL=https://datasheet.ciiva.com/13389/upy-gp-np0-16v-to-50v-8-13389355.pdf?src-supplier=Mouser, Composition=Ceramic, Construction=Flat, Datasheet URL=http://www.yageo.com/documents/recent/UPY-GP_NP0_16V-to-50V_14.pdf, Datasheet Version="Rev. 14, 07/2016", Depth=0.5mm, Height=0.5mm, Lead Free=LeadFree, Length=1mm, Manufacturer URL=http://www.yageo.com/, Mount=SurfaceMount, Package Reference=0402, Packaging=TapeandReel, Pricing 1="1=0.10000, 10=0.02700, 50=0.01500, 100=0.01220, 500=0.00870, 1000=0.00683, 2500=0.00621, 5000=0.00571 (USD)", Radiation Hardening=No, REACH SVHC=NoSVHC, Resistor Type=Ceramic, RoHS=Yes, RoHS Compliant=Yes, RoHSCompliant=True, Series=CC, Stock 1=254020, Supplier 1=Digi-Key, Termination=SMD/SMT, Thickness=0.022inch, Voltage Rating (DC)=50V, Width=0.02inch
C10: library part CMP-2008-04642-1, Case Code (Imperial)=0402, Case Code (Metric)=1005, Dielectric=X7R, Manufacturer=Murata, Manufacturer Part Number=GRM155R71H152KA01D, Max Operating Temperature=125°C, Min Operating Temperature=-55°C, Package Quantity=10000, Supplier Part Number 1=490-3245-1-ND, Tolerance=10%, Voltage=50V, Capacitance=1.5nF, Case/Package=0402, Category="Ceramic Capacitors", ComponentLink1Description=https://datasheet.ciiva.com/18184/getdatasheetpartid-153042-18184727.pdf?src-supplier=Verical, ComponentLink1URL=https://datasheet.ciiva.com/18184/getdatasheetpartid-153042-18184727.pdf?src-supplier=Verical, ComponentLink2Description=https://datasheet.ciiva.com/19476/1856441-19476519.pdf?src-supplier=Jameco, ComponentLink2URL=https://datasheet.ciiva.com/19476/1856441-19476519.pdf?src-supplier=Jameco, ComponentLink3Description=https://datasheet.ciiva.com/129/grm155r71h152ka01-01-129756.pdf?src-supplier=Digi-Key, ComponentLink3URL=https://datasheet.ciiva.com/129/grm155r71h152ka01-01-129756.pdf?src-supplier=Digi-Key, ComponentLink4Description=https://datasheet.ciiva.com/129/grm155r71h152ka01-01-129757.pdf?src-supplier=Digi-Key, ComponentLink4URL=https://datasheet.ciiva.com/129/grm155r71h152ka01-01-129757.pdf?src-supplier=Digi-Key, ComponentLink5Description=https://datasheet.ciiva.com/129/grm155r71h152ka01-01-129758.pdf?src-supplier=Digi-Key, ComponentLink5URL=https://datasheet.ciiva.com/129/grm155r71h152ka01-01-129758.pdf?src-supplier=Digi-Key, ComponentLink6Description=https://datasheet.ciiva.com/29199/454238-da-01-en-vs-kondensator-0402-29199743.pdf?src-supplier=Conrad, ComponentLink6URL=https://datasheet.ciiva.com/29199/454238-da-01-en-vs-kondensator-0402-29199743.pdf?src-supplier=Conrad, ComponentLink7Description=https://datasheet.ciiva.com/22698/608985-22698421.pdf?src-supplier=Element14, ComponentLink7URL=https://datasheet.ciiva.com/22698/608985-22698421.pdf?src-supplier=Element14, ComponentLink8Description=https://datasheet.ciiva.com/7937/608985-7937626.pdf?src-supplier=Element14, ComponentLink8URL=https://datasheet.ciiva.com/7937/608985-7937626.pdf?src-supplier=Element14, ComponentLink9Description=https://datasheet.ciiva.com/2989/product-2989403.pdf?src-supplier=Avnet, ComponentLink9URL=https://datasheet.ciiva.com/2989/product-2989403.pdf?src-supplier=Avnet, ComponentLink10Description=https://datasheet.ciiva.com/14116/grmseries-highdielectrictype-eng-14116907.pdf?src-supplier=Distrelec, ComponentLink10URL=https://datasheet.ciiva.com/14116/grmseries-highdielectrictype-eng-14116907.pdf?src-supplier=Distrelec, ComponentLink11Description=https://datasheet.ciiva.com/16199/product-16199179.pdf?src-supplier=Future+Electronics, ComponentLink11URL=https://datasheet.ciiva.com/16199/product-16199179.pdf?src-supplier=Future+Electronics, ComponentLink12Description=https://datasheet.ciiva.com/14116/grmseries-highdielectrictype-eng-14116846.pdf?src-supplier=Distrelec, ComponentLink12URL=https://datasheet.ciiva.com/14116/grmseries-highdielectrictype-eng-14116846.pdf?src-supplier=Distrelec, Depth=0.5mm, Height=0.5mm, Lead Free="Lead Free", Length=1mm, Material=Ceramic, Mount="Surface Mount", Number of Pins=2, Packaging="Tape and Reel", Part Number=GRM155R71H152KA01D, Pricing 1="1=0.10000, 10=0.02200, 50=0.01180, 100=0.00960, 500=0.00686, 1000=0.00538, 2500=0.00490, 5000=0.00450 (USD)", Radiation Hardening=No, REACH SVHC="No SVHC", RoHS=Yes, RoHS Compliant=Yes, Stock 1=353359, Supplier 1=Digi-Key, Termination=SMD/SMT, Thickness=0.022inch, Voltage Rating=50V, Voltage Rating (DC)=50V, Width=0.5mm
C12: library part CMP-2000-07581-1, "Chip Capacitor, 4.7 uF, +/- 10%, 50 V, -55 to 125 degC, 1206 (3216 Metric), RoHS, Tape and Reel", Case Code (Imperial)=1206, Case Code (Metric)=3216, Dielectric=X7R, Manufacturer=AVX, Manufacturer Part Number=12065C475KAT2A, Max Operating Temperature=125degC, Min Operating Temperature=-55degC, Package Description="2-Pin Surface Mount Device, Body 3.2 x 1.6 mm", Package Quantity=1, Supplier Part Number 1=478-6653-1-ND, Tolerance=10%, Voltage Rating=50V, Capacitance=4.7uF, Case/Package=1206, Case\/Package=1206, Category="Ceramic Capacitors", ComponentLink1Description=https://datasheet.ciiva.com/5410/cx7r-218113-5410549.pdf?src-supplier=Mouser, ComponentLink1URL=https://datasheet.ciiva.com/5410/cx7r-218113-5410549.pdf?src-supplier=Mouser, ComponentLink2Description=https://datasheet.ciiva.com/16387/flexiterm-16387141.pdf?src-supplier=Future+Electronics, ComponentLink2URL=https://datasheet.ciiva.com/16387/flexiterm-16387141.pdf?src-supplier=Future+Electronics, ComponentLink3Description=https://datasheet.ciiva.com/153/cx7r-153750.pdf?src-supplier=Digi-Key, ComponentLink3URL=https://datasheet.ciiva.com/153/cx7r-153750.pdf?src-supplier=Digi-Key, ComponentLink4Description=https://datasheet.ciiva.com/7833/cx7r-7833462.pdf?src-supplier=Element14, ComponentLink4URL=https://datasheet.ciiva.com/7833/cx7r-7833462.pdf?src-supplier=Element14, ComponentLink5Description=https://datasheet.ciiva.com/153/cx7r-153751.pdf?src-supplier=Digi-Key, ComponentLink5URL=https://datasheet.ciiva.com/153/cx7r-153751.pdf?src-supplier=Digi-Key, ComponentLink6Description=https://datasheet.ciiva.com/7833/cx7r-7833463.pdf?src-supplier=Element14, ComponentLink6URL=https://datasheet.ciiva.com/7833/cx7r-7833463.pdf?src-supplier=Element14, ComponentLink7Description=https://datasheet.ciiva.com/153/cx7r-153752.pdf?src-supplier=Digi-Key, ComponentLink7URL=https://datasheet.ciiva.com/153/cx7r-153752.pdf?src-supplier=Digi-Key, Contact Plating=Matte, Datasheet URL=http://datasheets.avx.com/X7RDielectric.pdf, Datasheet Version=03/2017, Depth=1.6mm, Dissipation Factor=2.5%, Lead Free=LeadFree, Length=3.2mm, Manufacturer URL=http://www.avx.com/, Mount=SurfaceMount, Mounting Technology=SurfaceMount, Package Reference=1206, Packaging=TapeandReel, Pricing 1="1=0.51000, 10=0.35400, 100=0.21250, 500=0.15940, 1000=0.13460 (USD)", Radiation Hardening=No, REACH SVHC=NoSVHC, RoHS=Yes, RoHSCompliant=True, Stock 1=241833, Supplier 1=Digi-Key, Termination=SMD/SMT, Thickness=0.07inch, Voltage Rating (DC)=50V, Width=1.6mm
C13: library part CMP-2008-02563-1, "CERAMIC CAPACITOR, 10PF, 50V, C0G, 5%, SMD, FULL REEL; Product Range:-; Capacitance:10pF; Capacitance Tolerance: 5%; Dielectric Characteristic:C0G / NP0; Voltage Rating:50V; Ceramic Capacitor Case:0402 [1005 Metric]; No. of Pins:2 ;RoHS Compliant: Yes", Case Code (Imperial)=0402, Case Code (Metric)=1005, Dielectric=C0G, Dielectric Material=Ceramic, Manufacturer="AVX Interconnect / Elco", Manufacturer Part Number=04025A100DAT2A, Max Operating Temperature=125°C, Min Operating Temperature=-55°C, Package Quantity=1, Supplier Part Number 1=478-7870-1-ND, Temperature coefficient=30ppm/°C, Tolerance=5%, Voltage=50V, Capacitance=10pF, Case/Package=0402, Category="Ceramic Capacitors", ComponentLink1Description=https://datasheet.ciiva.com/11788/0900766b80def0e2-11788539.pdf?src-supplier=RSComponents, ComponentLink1URL=https://datasheet.ciiva.com/11788/0900766b80def0e2-11788539.pdf?src-supplier=RSComponents, ComponentLink2Description=https://datasheet.ciiva.com/2990/ccog-2990165.pdf?src-supplier=Avnet, ComponentLink2URL=https://datasheet.ciiva.com/2990/ccog-2990165.pdf?src-supplier=Avnet, ComponentLink3Description=https://datasheet.ciiva.com/16623/ccog-16623350.pdf?src-supplier=Avnet+Europe, ComponentLink3URL=https://datasheet.ciiva.com/16623/ccog-16623350.pdf?src-supplier=Avnet+Europe, ComponentLink4Description=https://datasheet.ciiva.com/14906/ccog-14906265.pdf?src-supplier=Digi-Key, ComponentLink4URL=https://datasheet.ciiva.com/14906/ccog-14906265.pdf?src-supplier=Digi-Key, ComponentLink5Description=https://datasheet.ciiva.com/206/ccog-206459.pdf?src-supplier=Digi-Key, ComponentLink5URL=https://datasheet.ciiva.com/206/ccog-206459.pdf?src-supplier=Digi-Key, ComponentLink6Description=https://datasheet.ciiva.com/14906/ccog-14906267.pdf?src-supplier=Digi-Key, ComponentLink6URL=https://datasheet.ciiva.com/14906/ccog-14906267.pdf?src-supplier=Digi-Key, ComponentLink7Description=https://datasheet.ciiva.com/1123/ccog-1123468.pdf?src-supplier=Element14, ComponentLink7URL=https://datasheet.ciiva.com/1123/ccog-1123468.pdf?src-supplier=Element14, ComponentLink8Description=https://datasheet.ciiva.com/1123/ccog-1123469.pdf?src-supplier=Element14, ComponentLink8URL=https://datasheet.ciiva.com/1123/ccog-1123469.pdf?src-supplier=Element14, Construction=Flat, Contact Plating=Tin,Matte, Depth=0.5mm, Height=0.56mm, Lead Free="Lead Free", Length=1mm, Mount="Surface Mount", Number of Pins=2, Packaging="Tape and Reel", Part Number=04025A100DAT2A, Pricing 1="1=0.30000, 10=0.20700, 50=0.13800, 100=0.11730, 500=0.08280, 1000=0.07245, 2500=0.06900, 5000=0.06382 (USD)", Radiation Hardening=No, REACH SVHC="No SVHC", RoHS=Yes, RoHS Compliant=Yes, Series=-, Stock 1=172687, Supplier 1=Digi-Key, Termination=SMD/SMT, Thickness=0.022inch, Voltage Rating=50V, Voltage Rating (DC)=50V, Width=0.02inch
C15: library part CMP-1037-04985-1, "CAP 22uF 6.3V ±10% 1206 (3216 Metric) Thickness 1.9mm SMD", Case Code (Imperial)=1206, Case Code (Metric)=3216, Dielectric=X7R, Manufacturer="Kyocera AVX", Manufacturer Part Number=12066C226KAT2A, Max Operating Temperature=125°C, Min Operating Temperature=-55°C, Package Quantity=2500, Rated Voltage="6.3 V", Supplier Part Number 1=478-5997-1-ND, Tolerance=Â±10%, Voltage=6.3V, Capacitance=22uF, Case-EIA=1206, Case-Metric=3216, Case/Package=1206, Category="Ceramic Capacitors", ComponentLink1Description=https://datasheet.ciiva.com/11786/0900766b80dc2409-11786266.pdf?src-supplier=RSComponents, ComponentLink1URL=https://datasheet.ciiva.com/11786/0900766b80dc2409-11786266.pdf?src-supplier=RSComponents, ComponentLink2Description=https://datasheet.ciiva.com/16315/cx7r-16315655.pdf?src-supplier=Future+Electronics, ComponentLink2URL=https://datasheet.ciiva.com/16315/cx7r-16315655.pdf?src-supplier=Future+Electronics, ComponentLink3Description=https://datasheet.ciiva.com/154/cx7r-154924.pdf?src-supplier=Digi-Key, ComponentLink3URL=https://datasheet.ciiva.com/154/cx7r-154924.pdf?src-supplier=Digi-Key, ComponentLink4Description=https://datasheet.ciiva.com/154/cx7r-154925.pdf?src-supplier=Digi-Key, ComponentLink4URL=https://datasheet.ciiva.com/154/cx7r-154925.pdf?src-supplier=Digi-Key, ComponentLink5Description=https://datasheet.ciiva.com/154/cx7r-154926.pdf?src-supplier=Digi-Key, ComponentLink5URL=https://datasheet.ciiva.com/154/cx7r-154926.pdf?src-supplier=Digi-Key, Contact Plating=Tin,Matte, Depth=1.6mm, Dissipation Factor=5%, Height=1.78mm, Lead Free="Lead Free", Length=3.2mm, Max Thickness="1.9 mm", Mount="Surface Mount", Number of Pins=2, Packaging="Tape and Reel", Pricing 1="1=0.81000, 10=0.57100, 100=0.37570, 500=0.27830, 1000=0.23656 (USD)", Radiation Hardening=No, REACH SVHC="No SVHC", RoHS=Yes, Stock 1=4915, Supplier 1=Digi-Key, Technology=SMT, Termination=SMD/SMT, Thickness=0.07inch, Voltage Rating=6.3V, Voltage Rating (DC)=6.3V, Width=1.6mm
C16: library part CMP-1034-00812-2, "Cap Ceramic 15pF 50V C0G 1% SMD 0402 125C Paper T/R", Case Code (Imperial)=0402, Case Code (Metric)=1005, Dielectric=C0G, Dielectric Material=Ceramic, Manufacturer="AVX Interconnect / Elco", Manufacturer Part Number=04025A150FAT2A, Max Operating Temperature=125°C, Min Operating Temperature=-55°C, Package Quantity=1, Supplier Part Number 1=478-5126-1-ND, Tolerance=1%, Voltage=50V, Capacitance=15pF, Case/Package=0402, Category="Ceramic Capacitors", ComponentLink1Description=https://datasheet.ciiva.com/26927/getdatasheetpartid-379176-26927300.pdf?src-supplier=Verical, ComponentLink1URL=https://datasheet.ciiva.com/26927/getdatasheetpartid-379176-26927300.pdf?src-supplier=Verical, ComponentLink2Description=https://datasheet.ciiva.com/157/ccog-157986.pdf?src-supplier=Digi-Key, ComponentLink2URL=https://datasheet.ciiva.com/157/ccog-157986.pdf?src-supplier=Digi-Key, ComponentLink3Description=https://datasheet.ciiva.com/157/ccog-157987.pdf?src-supplier=Digi-Key, ComponentLink3URL=https://datasheet.ciiva.com/157/ccog-157987.pdf?src-supplier=Digi-Key, ComponentLink4Description=https://datasheet.ciiva.com/157/ccog-157988.pdf?src-supplier=Digi-Key, ComponentLink4URL=https://datasheet.ciiva.com/157/ccog-157988.pdf?src-supplier=Digi-Key, ComponentLink5Description=https://datasheet.ciiva.com/14603/70001039-14603477.pdf?src-supplier=Allied+Electronics, ComponentLink5URL=https://datasheet.ciiva.com/14603/70001039-14603477.pdf?src-supplier=Allied+Electronics, ComponentLink6Description=https://datasheet.ciiva.com/28453/1796416-28453769.pdf?src-supplier=Element14, ComponentLink6URL=https://datasheet.ciiva.com/28453/1796416-28453769.pdf?src-supplier=Element14, ComponentLink7Description=https://datasheet.ciiva.com/22619/1796416-22619722.pdf?src-supplier=Element14, ComponentLink7URL=https://datasheet.ciiva.com/22619/1796416-22619722.pdf?src-supplier=Element14, ComponentLink8Description=https://datasheet.ciiva.com/11568/ccog-11568587.pdf?src-supplier=Avnet, ComponentLink8URL=https://datasheet.ciiva.com/11568/ccog-11568587.pdf?src-supplier=Avnet, Construction=Flat, Depth=0.5mm, Height=0.56mm, Lead Free="Lead Free", Length=1mm, Mount="Surface Mount,PCB", Number of Pins=2, Packaging="Tape and Reel", Part Number=04025A150FAT2A, Pricing 1="1=0.57000, 10=0.40100, 50=0.30300, 100=0.26390, 500=0.19550, 1000=0.16618, 2500=0.15640, 5000=0.14662 (USD)", Radiation Hardening=No, REACH SVHC="No SVHC", RoHS=Yes, RoHS Compliant=Yes, Series=-, Stock 1=101927, Supplier 1=Digi-Key, Termination=SMD/SMT, Thickness=0.022inch, Voltage Rating=50V, Voltage Rating (DC)=50V, Width=0.02inch
C17: library part CMP-2008-02925-1, Case Code (Imperial)=0402, Case Code (Metric)=1005, Dielectric=X7R, Manufacturer="AVX Interconnect / Elco", Manufacturer Part Number=04023C103JAT2A, Max Operating Temperature=125°C, Min Operating Temperature=-55°C, Package Quantity=1, Supplier Part Number 1=478-7867-1-ND, Tolerance=5%, Voltage Rating=25V, Capacitance=10nF, Case/Package=0402, Category="Ceramic Capacitors", ComponentLink1Description=https://datasheet.ciiva.com/11499/cx7r-11499815.pdf?src-supplier=Avnet, ComponentLink1URL=https://datasheet.ciiva.com/11499/cx7r-11499815.pdf?src-supplier=Avnet, ComponentLink2Description=https://datasheet.ciiva.com/5424/cx7r-218113-5424201.pdf?src-supplier=Mouser, ComponentLink2URL=https://datasheet.ciiva.com/5424/cx7r-218113-5424201.pdf?src-supplier=Mouser, ComponentLink3Description=https://datasheet.ciiva.com/7614/cx7r-7614730.pdf?src-supplier=Digi-Key, ComponentLink3URL=https://datasheet.ciiva.com/7614/cx7r-7614730.pdf?src-supplier=Digi-Key, ComponentLink4Description=https://datasheet.ciiva.com/208/cx7r-208205.pdf?src-supplier=Digi-Key, ComponentLink4URL=https://datasheet.ciiva.com/208/cx7r-208205.pdf?src-supplier=Digi-Key, ComponentLink5Description=https://datasheet.ciiva.com/14906/cx7r-14906237.pdf?src-supplier=Digi-Key, ComponentLink5URL=https://datasheet.ciiva.com/14906/cx7r-14906237.pdf?src-supplier=Digi-Key, ComponentLink6Description=https://datasheet.ciiva.com/16397/cx7r-16397645.pdf?src-supplier=Future+Electronics, ComponentLink6URL=https://datasheet.ciiva.com/16397/cx7r-16397645.pdf?src-supplier=Future+Electronics, ComponentLink7Description=https://datasheet.ciiva.com/14906/cx7r-14906238.pdf?src-supplier=Digi-Key, ComponentLink7URL=https://datasheet.ciiva.com/14906/cx7r-14906238.pdf?src-supplier=Digi-Key, Construction=Flat, Depth=0.5mm, Lead Free="Lead Free", Length=1mm, Mount="Surface Mount", Number of Pins=2, Packaging="Tape and Reel", Part Number=04023C103JAT2A, Pricing 1="1=0.35000, 10=0.24300, 50=0.16980, 100=0.14560, 500=0.10920, 1000=0.09221, 2500=0.08735, 5000=0.08250 (USD)", Radiation Hardening=No, RoHS=Yes, RoHS Compliant=Yes, Series=-, Stock 1=9321, Supplier 1=Digi-Key, Termination=SMD/SMT, Thickness=0.022inch, Voltage Rating (DC)=25V, Width=0.5mm
C18: library part CMP-2000-05454-1, "Chip Capacitor, 1 uF, +/- 10%, 100 V, -55 to 125 degC, 0805 (2012 Metric), RoHS, Tape and Reel", Capacitance=1µF, Case Code (Imperial)=0805, Case Code (Metric)=2012, Dielectric=X7S, Manufacturer=TDK, Manufacturer Part Number=C2012X7S2A105K125AB, Max Operating Temperature=125°C, Min Operating Temperature=-55°C, Operating Temperature=-55degC~125degC, Package / Case=0805(2012Metric), Package Description="2-Pin Surface Mount Device, Body 2 x 1.25 mm", Package Quantity=1, Package Reference=805, PCN Part Number=MLCCPartNumberChange30/Nov/2012, Ratings=-, Resistor Type=Ceramic, Supplier Part Number 1=445-5205-1-ND, Tolerance=±10%, Voltage=100V, Applications=GeneralPurpose, Case/Package=0805, Catalog Drawings=CSERIES_2012-0805_1.45, Category=Capacitors, ComponentLink1Description=https://datasheet.ciiva.com/24216/c2012x7s2a105k125ab-265082-24216433.pdf?src-supplier=Mouser, ComponentLink1URL=https://datasheet.ciiva.com/24216/c2012x7s2a105k125ab-265082-24216433.pdf?src-supplier=Mouser, ComponentLink2Description=https://datasheet.ciiva.com/16427/newmlccproducts-16427795.pdf?src-supplier=Future+Electronics, ComponentLink2URL=https://datasheet.ciiva.com/16427/newmlccproducts-16427795.pdf?src-supplier=Future+Electronics, ComponentLink3Description=https://datasheet.ciiva.com/8079/1833281-8079405.pdf?src-supplier=Element14, ComponentLink3URL=https://datasheet.ciiva.com/8079/1833281-8079405.pdf?src-supplier=Element14, Datasheet URL=https://datasheet.ciiva.com/24216/c2012x7s2a105k125ab-265082-24216433.pdf, Datasheet Version=Sep-13, Depth=1.25mm, Family=CeramicCapacitors, Featured Product=Compact,High-CapacitanceMultilayerCeramicChipCapacitorsMidVoltageX7S-100VMLCCsC-SeriesMidVoltageMLCCs, Features=-, Height=1.25mm, Height - Seated (Max)=-, Kits=445-9009-KIT-ND-KITCAPCERHICAP100V-630VSMDSAMPLEKIT1008-ND-KITCAPCERMLCC100V-630V, Lead Free="Lead Free", Lead Spacing=-, Lead Style=-, Length=2mm, Manufacturer URL=http://www.tdk.com/, Mount="Surface Mount", Mounting Type=SurfaceMount,MLCC, Number of Pins=2, Online Catalog=CSeries,MidVoltage, Other Names=445-5205-1, Packaging=CutTape(CT), Pricing 1="1=0.50000, 10=0.34500, 50=0.24160, 100=0.20700, 500=0.15524, 1000=0.13110 (USD)", Product Training Modules=SEAT,CCV,andTVCLDesignToolsCSeriesMidVoltageCapacitorsFamilyGuidetoReplacinganElectrolyticCapacitorwithanMLCC, REACH SVHC="No SVHC", RoHS=Yes, RoHS Compliant=Yes, RoHS Information=RoHSCertificate-MLCC, Series=C, Size / Dimension="0.079\"Lx0.049\"W(2.00mmx1.25mm)", Standard Package=1, Stock 1=274957, Supplier 1=Digi-Key, Temperature coefficient=X7S, Termination=SMD/SMT, Thickness=0.053inch, Thickness (Max)="0.053\"(1.35mm)", Voltage - Rated=100V, Voltage Rating=100V, Voltage Rating (DC)=100V, Weight=0.000194oz, Width=1.25mm
D1: library part CMP-1060-00431-1, "Zener Voltage Regulator, 500 mW, 2-Pin SOD-123, Pb-Free, Tape and Reel", Case/Package=SOD-123-2, Manufacturer="On Semiconductor", Manufacturer Part Number=SZMMSZ5265BT1G, Max Operating Temperature=150°C, Max Power Dissipation=500mW, Max Reverse Leakage Current=100nA, Min Operating Temperature=-55°C, Package Quantity=3000, Supplier Part Number 1=SZMMSZ5265BT1GOSCT-ND, Test Current=2mA, Tolerance=5%, Category="Zener Diodes", ComponentLink1Description="Manufacturer URL", ComponentLink1URL=http://www.onsemi.com/, ComponentLink2Description=Datasheet, ComponentLink2URL=http://www.onsemi.cn/pub_link/Collateral/MMSZ5221BT1-D.PDF, ComponentLink3Description="Package Specification", ComponentLink3URL=http://www.onsemi.com/pub_link/Collateral/425-04.PDF, ComponentLink4Description=https://datasheet.ciiva.com/900/mmsz5221bt1-d-900256.pdf?src-supplier=Digi-Key, ComponentLink4URL=https://datasheet.ciiva.com/900/mmsz5221bt1-d-900256.pdf?src-supplier=Digi-Key, ComponentLink5Description=https://datasheet.ciiva.com/10638/mmsz5221bt1-d-10638351.pdf?src-supplier=Avnet, ComponentLink5URL=https://datasheet.ciiva.com/10638/mmsz5221bt1-d-10638351.pdf?src-supplier=Avnet, DatasheetVersion="Rev. 12", Element Configuration=Single, Height=1.25mm, Impedance=185R, Lead Free="Lead Free", Length=2.84mm, Mounting Technology="Surface Mount", Number of Pins=2, P Max (W)=0.5, PackageDescription="2-Pin SOD, Body 1.6 x 2.69 mm", PackageReference=SOD-123-2-425-04, PackageVersion="Rev. G, 10/2009", Packaging="Tape and Reel", Packing="Tape and Reel", PartNumber=SZMMSZ5265BT1G, Pricing 1="1=0.37000, 10=0.25800, 100=0.13010, 500=0.10614, 1000=0.07875 (USD)", Radiation Hardening=No, RoHS=Pb-Free, RoHS Compliant=Yes, Stock 1=15621, Supplier 1=Digi-Key, Voltage Tolerance=5%, VZ Typ (V)=62, Width=1.8mm, Zener Voltage=62V
J1: "Connector", Manufacturer_Name="Wurth Elektronik", Mouser Part Number=710-61301011021, Datasheet Link=http://katalog.we-online.de/em/datasheet/6130xx11021.pdf, Height=2.54mm, Manufacturer_Part_Number=61301011021, Mouser Price/Stock=https://www.mouser.co.uk/ProductDetail/Wurth-Elektronik/61301011021/?qs=ZtY9WdtwX54YO5vJhQZSew%3D%3D
L1: library part CMP-0220-00181-1, "SMD EMI Suppression Ferrite Bead WE-CBF, Z = 600 Ohm", Case Code (Imperial)=0603, Case Code (Metric)=1608, Case/Package=SMD/SMT, Current Rating=1A, DC Resistance (DCR)=200mR, Inductance=0.36H, Manufacturer="Wurth Electronics", Max Operating Temperature=125°C, Min Operating Temperature=-55°C, Package Quantity=1, Supplier Part Number 1=732-1593-1-ND, Test Frequency=100MHz, Tolerance=25%, Category="Ferrite Beads and Chips", ComponentLink1Description="Manufacturer Link", ComponentLink1URL=http://www.we-online.com, ComponentLink2Description=Datasheet, ComponentLink2URL=http://www.we-online.de/katalog/media/pdf/742792651.pdf, ComponentLink3Description=https://datasheet.ciiva.com/11803/0900766b80d2e079-11803680.pdf?src-supplier=RSComponents, ComponentLink3URL=https://datasheet.ciiva.com/11803/0900766b80d2e079-11803680.pdf?src-supplier=RSComponents, ComponentLink4Description=https://datasheet.ciiva.com/1475/1705833-1475349.pdf?src-supplier=Farnell, ComponentLink4URL=https://datasheet.ciiva.com/1475/1705833-1475349.pdf?src-supplier=Farnell, ComponentLink5Description=https://datasheet.ciiva.com/1013/742792651-1013527.pdf?src-supplier=Digi-Key, ComponentLink5URL=https://datasheet.ciiva.com/1013/742792651-1013527.pdf?src-supplier=Digi-Key, ComponentLink6Description=https://datasheet.ciiva.com/4940/742792651-72243-4940492.pdf?src-supplier=Mouser, ComponentLink6URL=https://datasheet.ciiva.com/4940/742792651-72243-4940492.pdf?src-supplier=Mouser, ComponentLink7Description=https://datasheet.ciiva.com/1013/742792651-1013528.pdf?src-supplier=Digi-Key, ComponentLink7URL=https://datasheet.ciiva.com/1013/742792651-1013528.pdf?src-supplier=Digi-Key, ComponentLink8Description=https://datasheet.ciiva.com/1013/742792651-1013529.pdf?src-supplier=Digi-Key, ComponentLink8URL=https://datasheet.ciiva.com/1013/742792651-1013529.pdf?src-supplier=Digi-Key, ComponentLink9Description=https://datasheet.ciiva.com/22711/1705833-22711420.pdf?src-supplier=Element14, ComponentLink9URL=https://datasheet.ciiva.com/22711/1705833-22711420.pdf?src-supplier=Element14, Core Material=Ferrite, DatasheetVersion=Dec-2005, Depth=0.8mm, Height=0.8mm, Impedance="600 Ohm", Lead Free="Lead Free", Length=1.6mm, Manufacturer Part Number=742792651, Material=Ferrite, Max Current Rating=1A, Max DC Current=1A, Mount="Surface Mount", Number of Lines=1, PackageDescription="Chip Inductor, 2-Leads, Body 1.6 x 0.8 mm", PackageReference=SMD-0603, PackageVersion=2009, Packaging="Tape and Reel", Pricing 1="1=0.17000, 50=0.16800, 100=0.15500, 500=0.14800, 1000=0.14100, 2000=0.13400 (USD)", REACH SVHC=Unknown, Resistance=200mR, RoHS=Yes, RoHS Compliant=Yes, Series=WE-CBF, Stock 1=132361, Supplier 1=Digi-Key, Termination=SMD/SMT, Weight=0.000141oz, Width=0.8mm
L2: library part MPX1D0840L470, "Inductor 22uH", Manufacturer_Name=Kemet, Manufacturer_Part_Number=MPX1D0840L220, Mouser Part Number=80-MPX1D0840L220, Datasheet Link=https://componentsearchengine.com/Datasheets/1/MPX1D0840L470.pdf, Height=4mm, Mouser Price/Stock=https://www.mouser.com/Search/Refine.aspx?Keyword=80-MPX1D0840L470
L3: library part PA4340.472NLT, "Inductor 10uH", Manufacturer_Name=Pulse, Arrow Part Number=PA4340.472NLT, Arrow Price/Stock=https://www.arrow.com/en/products/pa4340.472nlt/pulse-electronics-corporation, Datasheet Link=https://www.arrow.com/en/products/pa4340.472nlt/pulse-electronics-corporation, Height=3mm, Manufacturer_Part_Number=PA4340.103NLT, Mouser Part Number=PA4340.103NLT, Mouser Price/Stock=https://www.mouser.co.uk/ProductDetail/Pulse-Electronics/PA4340472NLT?qs=%2FzQKu7YvIMZTHJkuI7emsg%3D%3D
Q1 Q2: library part CMP-1091-00311-1, "N-Channel OptiMOS 3 Power-Transistor, 80 V VDS, 23 A ID, -55 to 150 degC, PG-TSDSON-8-1, Reel, Green", Manufacturer=Infineon, ComponentLink1Description="Manufacturer URL", ComponentLink1URL=http://www.infineon.com/, ComponentLink2Description=Datasheet, ComponentLink2URL=http://www.infineon.com/dgdl/BSZ340N08NS3G_rev2.3.pdf?folderId=db3a304313b8b5a60113cee8763b02d7&fileId=db3a30431ff9881501206626660b6c72, ComponentLink3Description="Package Specification", ComponentLink3URL=http://www.infineon.com/dgdl/BSZ240N12NS3+Rev2.0.pdf?folderId=db3a304313b8b5a60113cee8763b02d7&fileId=db3a30432a40a650012a42f3057a0038, DatasheetVersion="Rev. 2.3", Green=TRUE, Halogen-free=TRUE, ID (max)="23Â A", IDpuls (max)="92Â A", Mounting Technology="Surface Mount", PackageDescription="8-Pin Plastic (Green) Thin Dual Small Outline Non-Leaded Package, 3.3 x 3.3 mm Body, 0.65 mm Pitch", PackageReference=PG-TSDSON-8-1, PackageVersion="Rev. 02, 09/2008", Packing=Reel, PartNumber=IAUZ20N08S5L300, Polarity=N, Ptot (max)="32Â W", QG="6.8Â nC", RDS (on) (max)="34Â mOhm", RDS (on) (max) (@4.5V)="66Â mOhm", Rth="3.9Â K/W", RthJA (max)="60 K/W", RthJC (max)="3.9Â K/W", VDS (max)="80Â V", VGS(th) (max)="3.5Â V", VGS(th) (min)="2Â V"